# Altium PCB TAFLab Sensors.PcbDoc
Units mm, origin at the board's own origin, x right, y up, seen from the top; angles counter-clockwise.
Board outline 170.5 x 86 mm, 4 copper layers (F.Cu, In1.Cu, In2.Cu, B.Cu); 32 components, 94 nets, 204 pads, 0 vias.
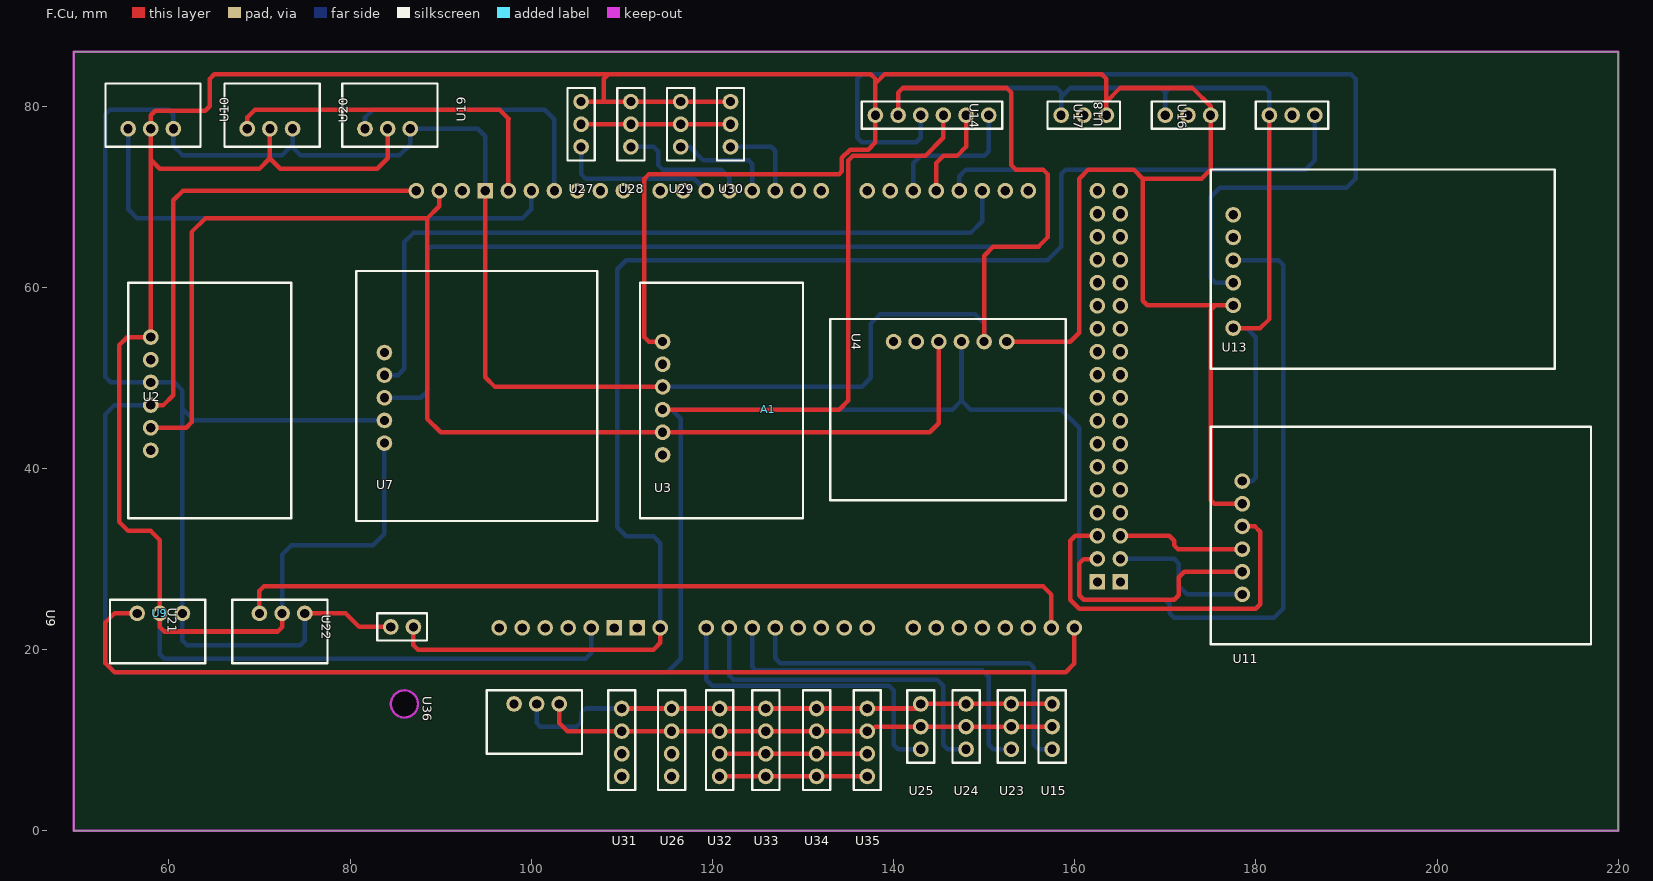
[diagram p0: F.Cu view]
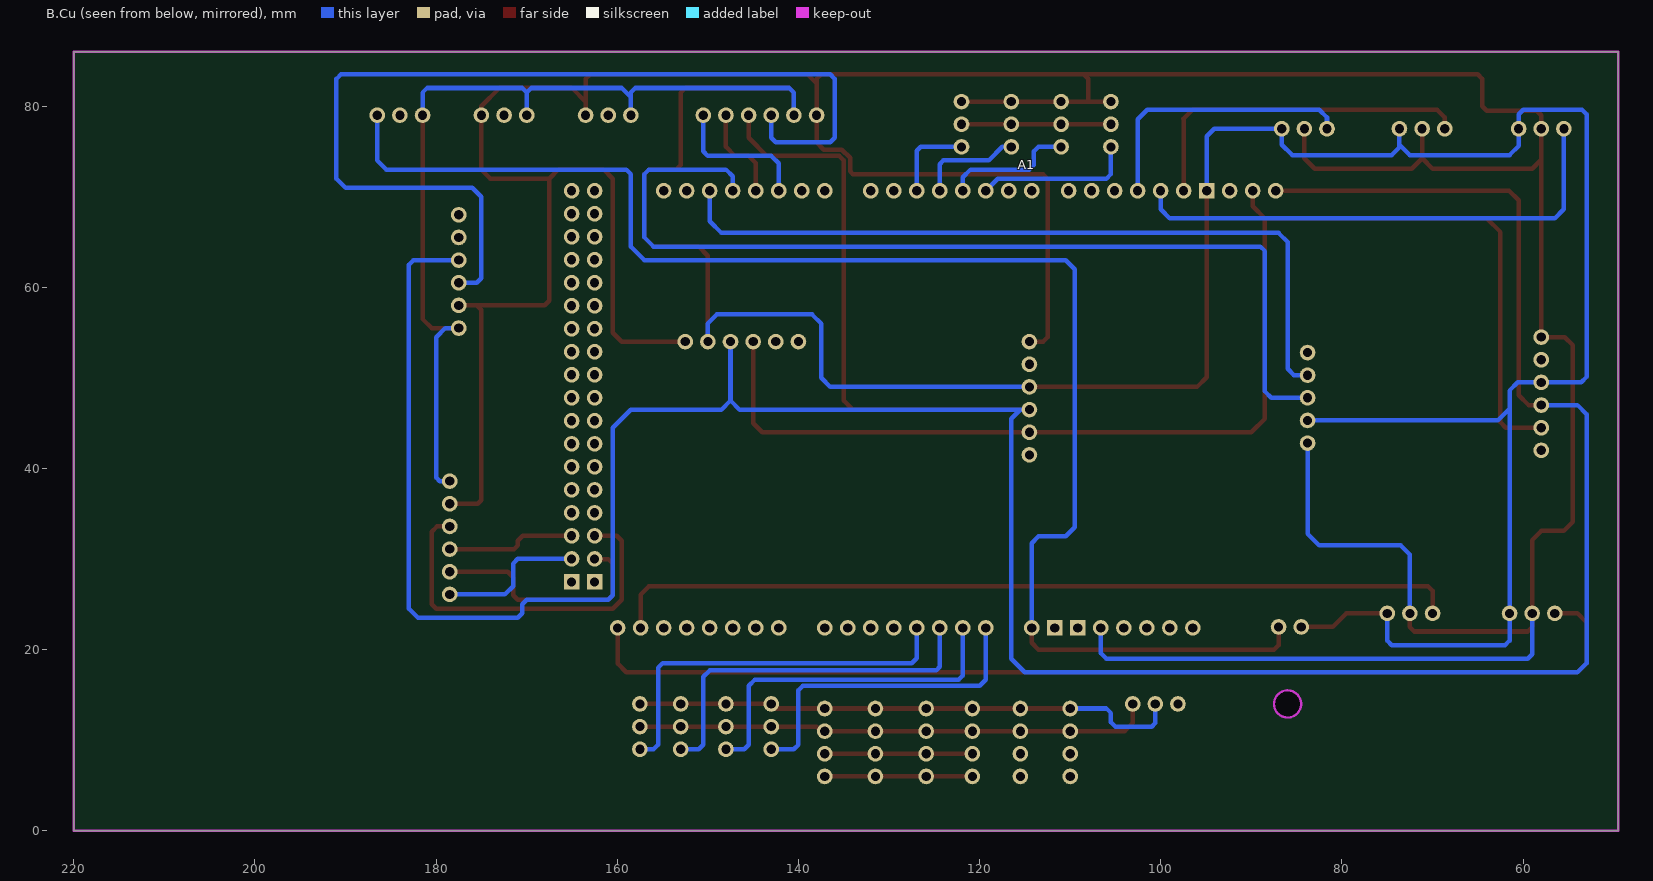
[diagram p1: B.Cu view, seen from below]
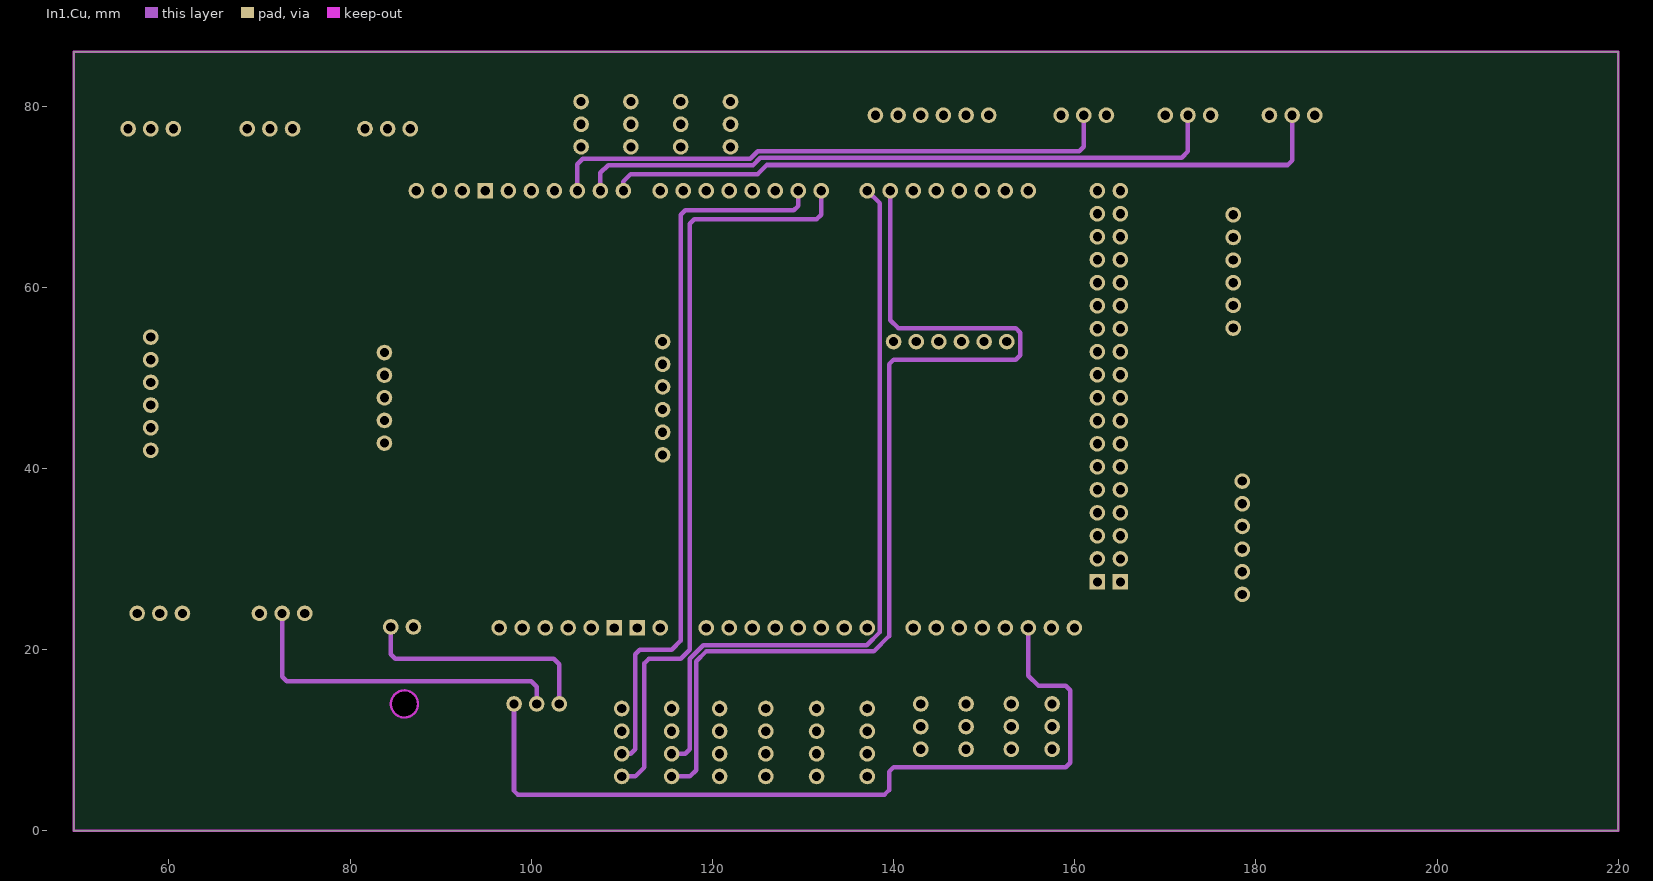
[diagram p2: In1.Cu]
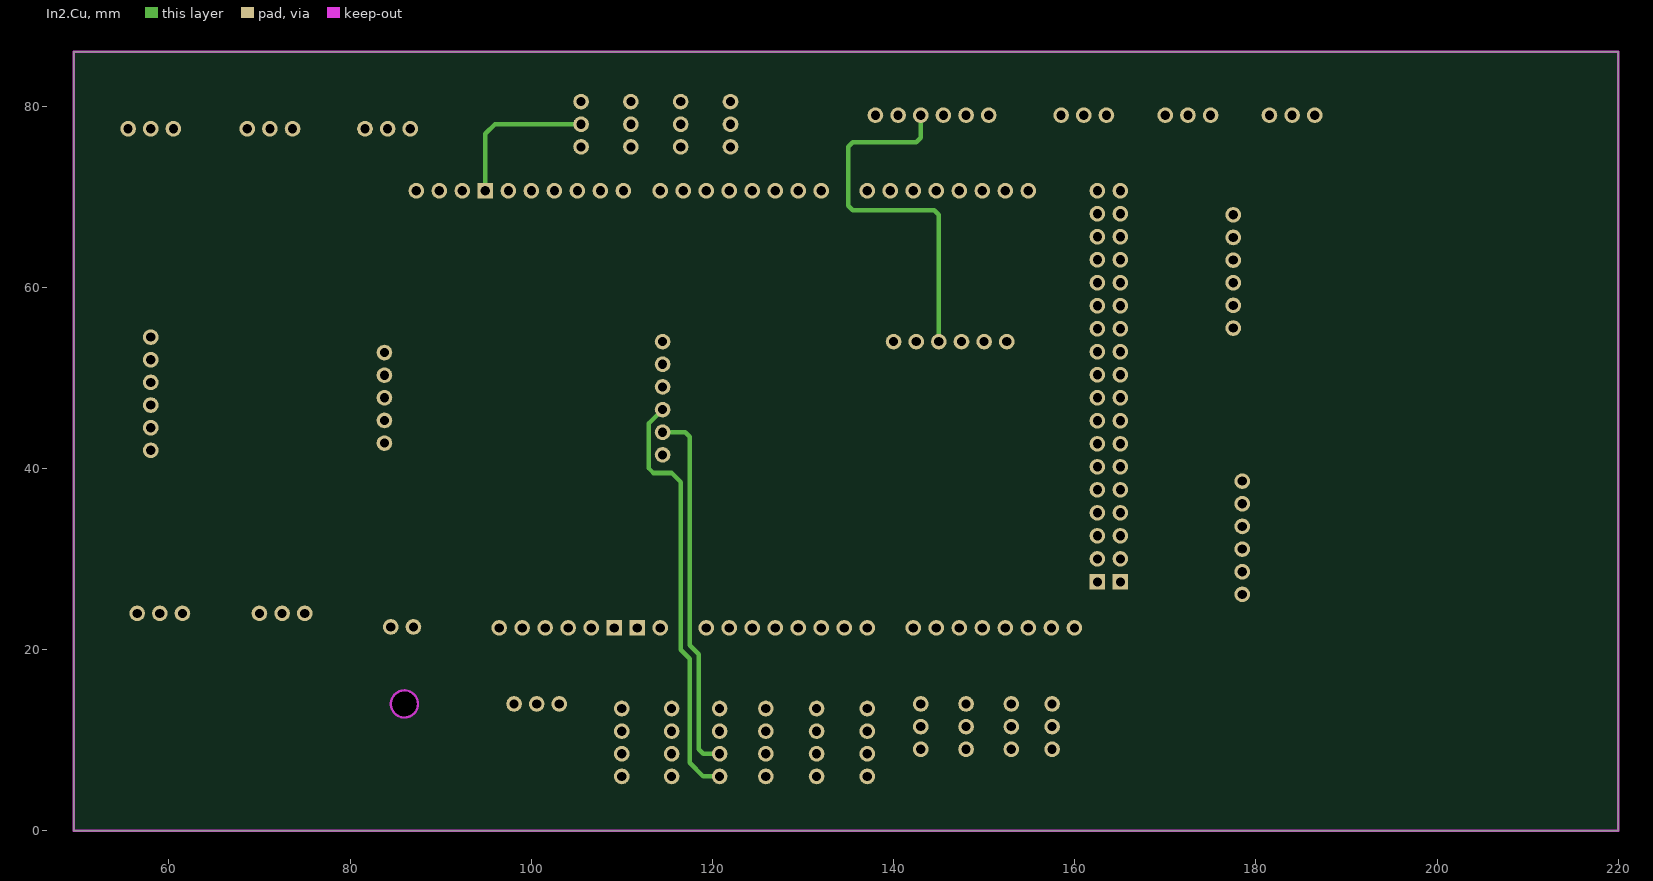
[diagram p3: In2.Cu]

## Layer stack, top to bottom
F.Mask: solder mask 0.0102, Solder Resist, Dk 3.5
F.Cu: signal copper 0.0356
Dielectric 1: dielectric 0.32, FR-4, Dk 4.8
In1.Cu: signal copper 0.0356
Dielectric2: dielectric 0.32, FR-4, Dk 4.8
In2.Cu: signal copper 0.0356
Dielectric3: dielectric 0.32, FR-4, Dk 4.8
B.Cu: signal copper 0.0356
B.Mask: solder mask 0.0102, Solder Resist, Dk 3.5

## Board outline
49.5,86 49.5,0 220,0 220,86 49.5,86
cut-out: 87.507,14 87.478,14.294 87.393,14.577 87.253,14.837 87.066,15.066 86.837,15.253 86.577,15.393 86.294,15.478 86,15.507 85.706,15.478 85.423,15.393 85.163,15.253 84.934,15.066 84.747,14.837 84.607,14.577 84.522,14.294 84.493,14 84.522,13.706 84.607,13.423 84.747,13.163 84.934,12.934 85.163,12.747 85.423,12.607 85.706,12.522 86,12.493 86.294,12.522 86.577,12.607 86.837,12.747 87.066,12.934 87.253,13.163 87.393,13.423 87.478,13.706 87.507,14

## Design rules (kind name [scope] priority, off if disabled: settings)
Clearance [All] p1: gap=0.254 ignorepadtopadclearanceinfootprint=FALSE
MinimumSolderMaskSliver [All] p1: minsoldermaskwidth=0
PolygonConnect [All] p1: connectstyle=Direct reliefconductorwidth=0.254 reliefentries=4 polygonreliefangle="90 Angle" airgapwidth=0.254
RoutingVias [All] p1: holewidth=0.711 width=1.27 viastyle="Through Hole" minholewidth=0.711 minwidth=1.27 maxholewidth=0.711 maxwidth=1.27
SilkToSilkClearance [All] p1: silktosilkclearance=0
SilkToSolderMaskClearance [IsPad] p1: minsilkscreentomaskgap=0 clearancetoexposedcopper=TRUE
SolderMaskExpansion [All] p1: expansion=0.102 istentingtop=FALSE
Width [All] p1: maxlimit=10 minlimit=0.254 preferedwidth=0.254 minimp=50.000000 maximp=50.000000 favimp=50.000000
27 further rules are at their usual default settings.

## Components (designator, comment, footprint, x,y, rotation, side; value= is the part's Value field where it differs from the comment)
A1 "Comment" Arduino_Mega2560_R3_Shield 112.5,19.3 r0 top value=Arduino_Mega2560_R3_Shield
U2 "Comment" LIS3MDL_Magnetometer 58,47.5 r0 top value=~
U3 "Comment" MPU6050_IMU_Accelerometer 114,38 r0 top value=~
U4 "Comment" INA219_BatteryPowerSensor 135.5,54 r270 top value=~
U7 "Comment" GT-U7_GPS 83.8,37.8 r0 top value=~
U9 "Comment" HW038_WaterLevelSensor 46.5,23.5 r270 top value=~
U10 "Comment" DS18B20_Water_Temp_Sensor 66.5,79.5 r90 top value=~
U11 "Comment" Micro_SD_Module 178.5,18.6 r0 top value=~
U13 "Comment" HW84_DS3231_CLK_Module 177.5,53 r0 top value=~
U14 "Comment" ActuatorConnector 148.5,79 r270 top value=~
U15 "Comment" Default3Pin 157.5,4 r0 top value=~
U16 "Comment" ActuatorConnector 171.5,79 r270 top value=~
U17 "Comment" ActuatorConnector 160,79 r270 top value=~
U18 "Comment" SailWireConnector 163,79 r90 top value=~
U19 "Comment" DS18B20_Water_Temp_Sensor 92.65,79.5 r90 top value=~
U20 "Comment" DS18B20_Water_Temp_Sensor 79.65,79.5 r90 top value=~
U21 "Comment" HW038_WaterLevelSensor 60,23.5 r270 top value=~
U22 "Comment" VinArduinoConnector 77,22.5 r270 top value=~
U23 "Comment" Default3Pin 153,4 r0 top value=~
U24 "Comment" Default3Pin 148,4 r0 top value=~
U25 "Comment" Default3Pin 143,4 r0 top value=~
U26 "Comment" Default4Pin 115.5,-1.5 r0 top value=~
U27 "Comment" Default3Pin 105.5,70.5 r0 top value=~
U28 "Comment" Default3Pin 111,70.5 r0 top value=~
U29 "Comment" Default3Pin 116.5,70.5 r0 top value=~
U30 "Comment" Default3Pin 122,70.5 r0 top value=~
U31 "Comment" Default4Pin 110,-1.5 r0 top value=~
U32 "Comment" Default4Pin 120.8,-1.5 r0 top value=~
U33 "Comment" Default4Pin 125.9,-1.5 r0 top value=~
U34 "Comment" Default4Pin 131.5,-1.5 r0 top value=~
U35 "Comment" Default4Pin 137.1,-1.5 r0 top value=~
U36 "Comment" HW038_WaterLevelSensor 88.1,13.5 r270 top value=~

## Footprints (in the part's own frame and the unit in brackets; to place one, negate y for a bottom-side part, rotate by r counter-clockwise, add the part's x,y. Pads: shape width x height; smd on the part's side, far side on the other; paste and mask are expansions set on the pad)
ActuatorConnector [mil]
  rrect100% 68x68 hole 40 paste-99999 mask+0: 1(0,590.55) 2(0,492.13) 3(0,393.7)
  silkscreen extent -59,335 59,650
Arduino_Mega2560_R3_Shield [mil]
  rrect100% 68x68 hole 40 paste-99999 mask+0: 3V3(-331.5,122.05) 5V1(-231.5,122.05) 5V3(1968.5,2022.05) 5V4(2068.5,2022.05) A0(268.5,122.05) A1(368.5,122.05) A2(468.5,122.05) A3(568.5,122.05) A4(668.5,122.05) A5(768.5,122.05) A6(868.5,122.05) A7(968.5,122.05) A8(1168.5,122.05) A9(1268.5,122.05) A10(1368.5,122.05) A11(1468.5,122.05) A12(1568.5,122.05) A13(1668.5,122.05) A14(1768.5,122.05) A15(1868.5,122.05) AREF(-791.5,2022.05) D0(768.5,2022.05) D1(668.5,2022.05) D2(568.5,2022.05) D3(468.5,2022.05) D4(368.5,2022.05) D5(268.5,2022.05) D6(168.5,2022.05) D7(68.5,2022.05) D8(-91.5,2022.05) D9(-191.5,2022.05) D10(-291.5,2022.05) D11(-391.5,2022.05) D12(-491.5,2022.05) D13(-591.5,2022.05) D14(968.5,2022.05) D15(1068.5,2022.05) D16(1168.5,2022.05) D17(1268.5,2022.05) D18(1368.5,2022.05) D19(1468.5,2022.05) D20(1568.5,2022.05) D21(1668.5,2022.05) D22(1968.5,1922.05) D23(2068.5,1922.05) D24(1968.5,1822.05) D25(2068.5,1822.05) D26(1968.5,1722.05) D27(2068.5,1722.05) D28(1968.5,1622.05) D29(2068.5,1622.05) D30(1968.5,1522.05) D31(2068.5,1522.05) D32(1968.5,1422.05) D33(2068.5,1422.05) D34(1968.5,1322.05) D35(2068.5,1322.05) D36(1968.5,1222.05) D37(2068.5,1222.05) D38(1968.5,1122.05) D39(2068.5,1122.05) D40(1968.5,1022.05) D41(2068.5,1022.05) D42(1968.5,922.05) D43(2068.5,922.05) D44(1968.5,822.05) D45(2068.5,822.05) D46(1968.5,722.05) D47(2068.5,722.05) D48(1968.5,622.05) D49(2068.5,622.05) D50(1968.5,522.05) D51(2068.5,522.05) D52(1968.5,422.05) D53(2068.5,422.05) IORF(-531.5,122.05) RST1(-431.5,122.05) SCL(-991.5,2022.05) SDA(-891.5,2022.05) Un1(-631.5,122.05) VIN(68.5,122.05)
  rect 68x68 hole 40 paste-99999 mask+0: GND1(-691.5,2022.05) GND2(-131.5,122.05) GND3(-31.5,122.05) GND5(1968.5,322.05) GND6(2068.5,322.05)
Default3Pin [mil]
  rrect100% 68x68 hole 40 paste-99999 mask+0: 1(0,393.7) 2(0,295.28) 3(0,196.85)
  silkscreen extent -59,138 59,453
Default4Pin [mil]
  rrect100% 68x68 hole 40 paste-99999 mask+0: 1(0,590.55) 2(0,492.13) 3(0,393.7) 4(0,295.28)
  silkscreen extent -59,236 59,669
DS18B20_Water_Temp_Sensor [mil]
  rrect100% 68x68 hole 40 paste-99999 mask+0: 1(-78.74,433.07) 2(-78.74,334.65) 3(-78.74,236.22)
  silkscreen extent -157,118 118,531
GT-U7_GPS [mil]
  rrect100% 68x68 hole 40 paste-99999 mask+0: 1(0,590.55) 2(0,492.13) 3(0,393.7) 4(0,295.28) 5(0,196.85)
  silkscreen extent -122,-142 925,945
HW038_WaterLevelSensor [mil]
  rrect100% 68x68 hole 40 paste-99999 mask+0: 1(-19.69,393.7) 2(-19.69,492.13) 3(-19.69,590.55)
  silkscreen extent -79,276 197,689
HW84_DS3231_CLK_Module [mil]
  rrect100% 68x68 hole 40 paste-99999 mask+0: 1(0,590.55) 2(0,492.13) 3(0,393.7) 4(0,295.28) 5(0,196.85) 6(0,98.43)
  silkscreen extent -98,-79 1398,787
INA219_BatteryPowerSensor [mil]
  rrect100% 68x68 hole 40 paste-99999 mask+0: 1(0,669.29) 2(0,570.87) 3(0,472.44) 4(0,374.02) 5(0,275.59) 6(0,177.17)
  silkscreen extent -98,-98 689,925
LIS3MDL_Magnetometer [mil]
  rrect100% 68x68 hole 40 paste-99999 mask+0: 1(0,275.59) 2(0,177.17) 3(0,78.74) 4(0,-19.68) 5(0,-118.11) 6(0,-216.54)
  silkscreen extent -98,-512 610,512
Micro_SD_Module [mil]
  rrect100% 68x68 hole 40 paste-99999 mask+0: 1(0,787.4) 2(0,688.98) 3(0,590.55) 4(0,492.13) 5(0,393.7) 6(0,295.28)
  silkscreen extent -138,79 1516,1024
MPU6050_IMU_Accelerometer [mil]
  rrect100% 68x68 hole 40 paste-99999 mask+0: 1(19.68,629.92) 2(19.68,531.5) 3(19.68,433.07) 4(19.68,334.65) 5(19.68,236.22) 6(19.68,137.8)
  silkscreen extent -79,-138 630,886
SailWireConnector [mil]
  rrect100% 68x68 hole 40 paste-99999 mask+0: 1(0,984.25) 2(0,885.83) 3(0,787.4) 4(0,688.98) 5(0,590.55) 6(0,492.13)
  silkscreen extent -59,433 59,1043
VinArduinoConnector [mil]
  rrect100% 68x68 hole 40 paste-99999 mask+0: 1(0,393.7) 2(0,295.28)
  silkscreen extent -59,236 59,453

## Part data
A1: library part Arduino_Mega2560_R3_Shield, "https://docs.arduino.cc/hardware/mega-2560", Footprint=PCM_arduino-library:Arduino_Mega2560_R3_Shield, Datasheet=https://docs.arduino.cc/hardware/mega-2560, Description="Shield for Arduino Mega 2560 R3", ki_fp_filters=Arduino_Mega2560_R3_Shield
U2: library part LIS3MDL_Magnetometer, Footprint=TAFLab-Footprint-Library:LIS3MDL_Magnetometer
U3: library part MPU6050_IMU_Accelerometer, Footprint=TAFLab-Footprint-Library:MPU6050_IMU_Accelerometer
U4: library part INA219_BatteryPowerSensor, Footprint=TAFLab-Footprint-Library:INA219_BatteryPowerSensor
U7: library part GT-U7_GPS, Footprint=TAFLab-Footprint-Library:GT-U7_GPS
U9 U21 U36: library part HW038_WaterLevelSensor, Footprint=TAFLab-Footprint-Library:HW038_WaterLevelSensor
U10 U19 U20: library part DS18B20_Water_Temp_Sensor, Footprint=TAFLab-Footprint-Library:DS18B20_Water_Temp_Sensor
U11: library part Micro_SD_Module, Footprint=TAFLab-Footprint-Library:Micro_SD_Module
U13: library part HW84_DS3231_CLK_Module, Footprint=TAFLab-Footprint-Library:HW84_DS3231_CLK_Module
U14 U16 U17: library part ActuatorConnector, Footprint=TAFLab-Footprint-Library:ActuatorConnector
U15 U23 U24 U25 U27 U28 U29 U30: library part Default3Pin, Footprint=TAFLab-Footprint-Library:Default3Pin
U18: library part SailWireConnector, Footprint=TAFLab-Footprint-Library:SailWireConnector
U22: library part VinArduinoConnector, Footprint=TAFLab-Footprint-Library:VinArduinoConnector
U26 U31 U32 U33 U34 U35: library part Default4Pin, Footprint=TAFLab-Footprint-Library:Default4Pin

## Nets (pads, with @x,y where several pads share a name; then routed paths per layer and width w, separated by ;. In a path a pad name is that pad's centre, name@x,y a point inside that pad or via, vN(x,y) a via of type N, cw(c..) or ccw(c..) an arc to the next point about the centre after c; other vN are vias at no path point)
5V: A1.5V1 U2.1 U3.1 U4.1 U7.5 U9.2 U10.2 U11.2 U13.5 U14.1 U15.1 U17.1 U18.1 U19.2 U20.2 U21.2 U23.1 U24.1 U25.1 U26.1 U27.1 U28.1 U29.1 U30.1 U31.1 U32.1 U33.1 U34.1 U35.1 U36.2 | length 600.5
  F.Cu w0.5: U20.2 71.15,74.25 ; U21.2 72.5,22.5 72,22 59.5,22 59,22.5 U9.2 59,32.1 58,33.1 55.5,33.1 54.5,34.1 54.5,53.6 55.4,54.5 U2.1 U10.2 ; U19.2 84.15,74.25 83,73.1 72.3,73.1 71.15,74.25 ; U27.1 108,80.5 ; U31.1 U32.1 U35.1 142.5,13.5 U25.1 U24.1 U15.1 ; U3.1 113,54 112.5,54.5 112.5,72 113,72.5 134,72.5 134.3,72.8 134.3,74.29 135.21,75.2 137.2,75.2 138,76 U18.1 ; U30.1 U29.1 108,80.5 ; U4.1 159.5,54 160.5,55 160.5,72 161.5,73 166.5,73 167.5,72 ; U14.1 163.5,83 163,83.5 139,83.5 138,82.5 U18.1 ; 163.5,80.5 165,82 173,82 175,80 U17.1 175,73 174,72 167.5,72 ; U13.5 175.5,58 ; U11.2 175.4,36.1 175,36.5 175,57.5 175.5,58 ; U10.2 58,74.1 59,73.1 70,73.1 71.15,74.25 ; U10.2 58,79 58.5,79.5 64,79.5 64.5,80 64.5,83 65,83.5 108.5,83.5 ; 108,80.5 108,83 108.5,83.5 ; 108.5,83.5 137.5,83.5 138,83 U18.1 ; 167.5,72 167.5,58.5 168,58 175.5,58
  In1.Cu w0.5: U21.2 72.5,17 73,16.5 100,16.5 100.6,15.9 U36.2
  B.Cu w0.5: U9.2 59,19.5 59.5,19 106,19 106.62,19.62 A1.5V1 ; U21.2 72.5,30.5 73.5,31.5 82.5,31.5 83.8,32.8 U7.5 ; U36.2 100.6,11.9 101,11.5 105,11.5 105.5,12 105.5,13 106,13.5 U31.1
8V: A1.VIN U16.1 U22.1 | length 166.4
  F.Cu w0.5: U22.1 87,20.5 87.5,20 113.5,20 114.24,20.74 A1.VIN
  B.Cu w0.5: A1.VIN 114.24,31.76 113.5,32.5 110.5,32.5 109.5,33.5 109.5,62 110.5,63 157,63 158.5,64.5 158.5,72.5 159,73 185.5,73 186.5,74 U16.1
A0: A1.A0 U25.3 | length 36.1
  B.Cu w0.5: A1.A0 119.32,16.68 120,16 139.5,16 140,15.5 140,9.5 140.5,9 U25.3
A1: A1.A1 U24.3 | length 38.6
  B.Cu w0.5: A1.A1 121.86,17.14 122.3,16.7 144.8,16.7 145.5,16 145.5,9.5 146,9 U24.3
A2: A1.A2 U23.3 | length 41.1
  B.Cu w0.5: A1.A2 124.4,18.1 124.8,17.7 149.8,17.7 150.5,17 150.5,9.5 151,9 U23.3
A3: A1.A3 U15.3 | length 43
  B.Cu w0.5: A1.A3 126.94,19.06 127.5,18.5 155,18.5 155.5,18 155.5,9.5 156,9 U15.3
A13: A1.A13 U36.1 | length 92.4
  In1.Cu w0.5: U36.1 98.1,4.4 98.5,4 139,4 139.5,4.5 139.5,6.5 140,7 159,7 159.5,7.5 159.5,15.5 159,16 156,16 154.88,17.12 A1.A13
A14: A1.A14 U21.1 | length 94.2
  F.Cu w0.5: U21.1 70,26.5 70.5,27 156.5,27 157.42,26.08 A1.A14
A15: A1.A15 U9.1 | length 120.1
  F.Cu w0.5: U9.1 54,24 53,23 53,18.5 54,17.5 159,17.5 159.96,18.46 A1.A15
CS: A1.D53 U11.6 | length 16.5
  B.Cu w0.5: A1.D53 170.98,30.02 171.5,29.5 171.5,27 172.4,26.1 U11.6
D2: A1.D2 U30.3 | length 9.5
  B.Cu w0.5: U30.3 126.5,75.5 126.94,75.06 A1.D2
D3: A1.D3 U29.3 | length 11.6
  B.Cu w0.5: U29.3 117.5,75.5 119,74 124,74 124.4,73.6 A1.D3
D4: A1.D4 U28.3 | length 14.6
  B.Cu w0.5: U28.3 113.5,75.5 114,75 114,73.5 114.5,73 121,73 121.86,72.14 A1.D4
D5: A1.D5 U27.3 | length 17.6
  B.Cu w0.5: U27.3 105.5,72.5 106,72 117.98,72 A1.D5
D8: A1.D8 U16.2 | length 80.8
  In1.Cu w0.5: A1.D8 110.176,71.676 111,72.5 125,72.5 126,73.5 183.5,73.5 184,74 U16.2
D9: A1.D9 U17.2 | length 71.8
  In1.Cu w0.5: A1.D9 107.636,72.636 108.486,73.486 124.476,73.486 124.49,73.5 124.5,73.5 125.3,74.3 171.8,74.3 172.5,75 U17.2
D10: A1.D10 U14.2 | length 63.1
  In1.Cu w0.5: A1.D10 105.096,73.596 105.686,74.186 124.186,74.186 125,75 160.5,75 161,75.5 U14.2
D11: A1.D11 U19.1 | length 30.8
  B.Cu w0.5: U19.1 81.65,78.75 82.5,79.6 101.5,79.6 102.556,78.544 A1.D11
D12: A1.D12 U10.1 | length 56.3
  B.Cu w0.5: U10.1 55.5,68.6 56.5,67.6 99,67.6 100.016,68.616 A1.D12
D13: A1.D13 U20.1 | length 38.8
  F.Cu w0.5: U20.1 68.65,78.75 69.5,79.6 96.5,79.6 97.5,78.6 97.476,78.576 A1.D13
GND: A1.GND1 U2.3 U3.3 U4.2 U7.4 U9.3 U10.3 U11.1 U13.6 U14.3 U15.2 U16.3 U17.3 U18.2 U19.3 U20.3 U21.3 U22.2 U23.2 U24.2 U25.2 U26.2 U27.2 U28.2 U29.2 U30.2 U31.2 U32.2 U33.2 U34.2 U35.2 U36.3 | length 531.3
  F.Cu w0.5: U21.3 79.5,24 81,22.5 U22.2 ; A1.GND1 94.936,50.064 96,49 U3.3 ; U36.3 103.1,11.9 104,11 U31.2 U35.2 137.5,11 138,11.5 U25.2 U24.2 U15.2 ; U27.2 U29.2 U30.2 ; U18.2 140.5,81.5 141,82 152.5,82 153,81.5 153,73.5 153.5,73 156.5,73 157,72.5 157,65.5 156,64.5 151,64.5 150,63.5 U4.2 ; U13.6 180.5,55.5 181.5,56.5 U16.3
  In1.Cu w0.5: U22.2 84.5,19.5 85,19 102.5,19 103.1,18.4 U36.3
  In2.Cu w0.5: A1.GND1 94.936,76.936 96,78 U27.2
  B.Cu w0.5: U21.3 75,21 74.5,20.5 62,20.5 61.5,21 U9.3 61.5,46.6 ; U7.4 62.8,45.3 61.5,46.6 ; A1.GND1 94.936,76.664 94.1,77.5 U19.3 86.65,75.75 85.5,74.6 74.5,74.6 73.65,75.45 U20.3 73.65,75.75 72.5,74.6 61.5,74.6 60.5,75.6 U10.3 60.5,79.1 60,79.6 53.5,79.6 53,79.1 53,50.1 53.6,49.5 U2.3 60.6,49.5 61.5,48.6 61.5,46.6 ; U3.3 136.5,49 137.5,50 137.5,56 138.5,57 149,57 150,56 U4.2 ; U18.2 140.5,81.5 141,82 158,82 158.5,81.5 U14.3 158.5,81 159.5,82 169.5,82 170,81.5 ; U17.3 170,81.5 ; U13.6 179,55.5 180,54.5 180,39 179.6,38.6 U11.1 ; U16.3 181.5,81.5 181,82 170.5,82 170,81.5
MISO: A1.D50 U11.3 | length 41.6
  F.Cu w0.5: A1.D50 160.06,32.56 159.5,32 159.5,25.5 160.5,24.5 180,24.5 180.5,25 180.5,33 179.9,33.6 U11.3
MOSI: A1.D51 U11.4 | length 14.4
  F.Cu w0.5: A1.D51 170.44,32.56 171,32 171,31.5 171.4,31.1 U11.4
RX0: A1.D1 U31.3 | length 79.9
  In1.Cu w0.5: U31.3 111,8.5 111.5,9 111.5,19.5 112,20 115.5,20 116.5,21 116.5,68 117,68.5 129,68.5 129.48,68.98 A1.D1
RX1: A1.D18 U7.3 | length 108.5
  B.Cu w0.5: U7.3 87.8,47.8 88.5,48.5 88.5,64 89,64.5 156,64.5 157,65.5 157,72.5 156.5,73 148,73 147.26,72.26 A1.D18
RX2: A1.D16 U18.6 | length 15.9
  B.Cu w0.5: A1.D16 142.18,73.68 143,74.5 150,74.5 150.5,75 U18.6
RX3: A1.D14 U26.3 | length 83.7
  In1.Cu w0.5: U26.3 117,8.5 117.5,9 117.5,19 119,20.5 137.058,20.5 138.5,21.942 138.5,69.26 A1.D14
SCK: A1.D52 U11.5 | length 26.4
  F.Cu w0.5: A1.D52 162.413,30.02 162.393,30 161,30 160.5,29.5 160.5,26 161,25.5 171,25.5 171.5,26 171.5,28 172.1,28.6 U11.5
SCL: A1.SCL U2.4 U3.4 U4.3 U13.3 U18.4 U32.4 U33.4 U34.4 U35.4 | length 443.3
  F.Cu w0.5: U2.4 59.4,47 60.5,48.1 60.5,69.6 61.56,70.66 A1.SCL ; U3.4 134,46.5 135,47.5 135,74 135.5,74.5 143.5,74.5 145.5,76.5 U18.4 ; U32.4 U35.4
  In2.Cu w0.5: U3.4 113,45 113,40 113.5,39.5 115.5,39.5 116.5,38.5 116.5,20 117.5,19 117.5,7.5 119,6 U32.4
  B.Cu w0.5: U2.4 54,47 53,46 53,18.5 54,17.5 115,17.5 116.5,19 116.5,45.5 115.5,46.5 U3.4 146.5,46.5 147.5,47.5 ; U4.3 147.5,47.5 ; U13.3 182.5,63 183,62.5 183,24.5 182,23.5 171,23.5 170.5,24 170.5,25 170,25.5 161,25.5 160.5,26 160.5,44.5 158.5,46.5 148.5,46.5 147.5,47.5
SDA: A1.SDA U2.5 U3.5 U4.4 U13.4 U18.3 U32.3 U33.3 U34.3 U35.3 | length 354.8
  F.Cu w0.5: U2.5 61.9,44.5 62.5,45.1 62.5,66.1 64,67.6 88.5,67.6 ; A1.SDA 89.856,68.956 88.5,67.6 ; U32.3 U35.3 ; U4.4 145,45 144,44 U3.5 90,44 88.5,45.5 88.5,67.6
  In2.Cu w0.5: U3.5 117,44 117.5,43.5 117.5,20.5 118.5,19.5 118.5,9 119,8.5 U32.3 ; U18.3 143,76.5 142.5,76 135.5,76 135,75.5 135,69 135.5,68.5 144.5,68.5 145,68 U4.4
  B.Cu w0.5: U18.3 143,76.5 142.5,76 136.5,76 136,76.5 136,83 136.5,83.5 171.936,83.5 171.963,83.527 171.991,83.5 190.5,83.5 191,83 191,72 190,71 176,71 175,70 175,61 175.5,60.5 U13.4
TX0: A1.D0 U31.4 | length 84.6
  In1.Cu w0.5: U31.4 111.5,6 112.5,7 112.5,18.5 113,19 116.5,19 117.5,20 117.5,67 118,67.5 131.5,67.5 132.02,68.02 A1.D0
TX1: A1.D19 U7.2 | length 84.6
  B.Cu w0.5: U7.2 85.3,50.3 86,51 86,65 87,66 148.5,66 149.8,67.3 A1.D19
TX2: A1.D17 U18.5 | length 10.6
  F.Cu w0.5: A1.D17 144.72,73.72 145.5,74.5 147,74.5 148,75.5 U18.5
TX3: A1.D15 U26.4 | length 114.1
  In1.Cu w0.5: U26.4 117.5,6 118.2,6.7 118.2,18.7 119.3,19.8 137.8,19.8 139.5,21.5 139.5,51.5 140,52 153.5,52 154,52.5 154,55 153.5,55.5 140.5,55.5 139.64,56.36 A1.D15
unconnected-(A1-3.3V-Pad3V3): A1.3V3
unconnected-(A1-5V-Pad5V3): A1.5V3
unconnected-(A1-5V-Pad5V4): A1.5V4
unconnected-(A1-D20{slash}SDA-PadD20): A1.D20
unconnected-(A1-D21{slash}SCL-PadD21): A1.D21
unconnected-(A1-GND-PadGND2): A1.GND2
unconnected-(A1-GND-PadGND3): A1.GND3
unconnected-(A1-GND-PadGND5): A1.GND5
unconnected-(A1-GND-PadGND6): A1.GND6
unconnected-(A1-IOREF-PadIORF): A1.IORF
unconnected-(A1-PadA4): A1.A4
unconnected-(A1-PadA5): A1.A5
unconnected-(A1-PadA6): A1.A6
unconnected-(A1-PadA7): A1.A7
unconnected-(A1-PadA8): A1.A8
unconnected-(A1-PadA9): A1.A9
unconnected-(A1-PadA10): A1.A10
unconnected-(A1-PadA11): A1.A11
unconnected-(A1-PadA12): A1.A12
unconnected-(A1-PadAREF): A1.AREF
unconnected-(A1-PadD6): A1.D6
unconnected-(A1-PadD7): A1.D7
unconnected-(A1-PadD22): A1.D22
unconnected-(A1-PadD23): A1.D23
unconnected-(A1-PadD24): A1.D24
unconnected-(A1-PadD25): A1.D25
unconnected-(A1-PadD26): A1.D26
unconnected-(A1-PadD27): A1.D27
unconnected-(A1-PadD28): A1.D28
unconnected-(A1-PadD29): A1.D29
unconnected-(A1-PadD30): A1.D30
unconnected-(A1-PadD31): A1.D31
unconnected-(A1-PadD32): A1.D32
unconnected-(A1-PadD33): A1.D33
unconnected-(A1-PadD34): A1.D34
unconnected-(A1-PadD35): A1.D35
unconnected-(A1-PadD36): A1.D36
unconnected-(A1-PadD37): A1.D37
unconnected-(A1-PadD38): A1.D38
unconnected-(A1-PadD39): A1.D39
unconnected-(A1-PadD40): A1.D40
unconnected-(A1-PadD41): A1.D41
unconnected-(A1-PadD42): A1.D42
unconnected-(A1-PadD43): A1.D43
unconnected-(A1-PadD44): A1.D44
unconnected-(A1-PadD45): A1.D45
unconnected-(A1-PadD46): A1.D46
unconnected-(A1-PadD47): A1.D47
unconnected-(A1-PadD48): A1.D48
unconnected-(A1-PadD49): A1.D49
unconnected-(A1-RESET-PadRST1): A1.RST1
unconnected-(U2-3Vo-Pad2): U2.2
unconnected-(U2-INT-Pad6): U2.6
unconnected-(U3-3Vo-Pad2): U3.2
unconnected-(U3-INT-Pad6): U3.6
unconnected-(U4-VIN+-Pad6): U4.6
unconnected-(U4-VIN--Pad5): U4.5
unconnected-(U7-PPS-Pad1): U7.1
unconnected-(U13-32K-Pad1): U13.1
unconnected-(U13-SQW-Pad2): U13.2
pads on no net: A1.Un1

## Keep-outs
Edge.Cuts:
  circle w0.254: c86,14 r1.5
  lines w0: 49.5,0 220,0 220,86 49.5,86 49.5,0
  lines w0.254: 49.5,0 220,0 220,86 49.5,86 49.5,0

## Silkscreen, mask and mechanical layers (free items; w line width, h text height)
F.Mask:
  text "WATER TEMP" at 53.81,79.8 h1
  text "WATER TEMP" at 66.96,79.8 h1
  text "WATER TEMP" at 80.11,79.8 h1
  text "V" at 123.59,79.513 h0.65
  text "G" at 123.605,77.013 h0.65
  text "S" at 188.133,76.8 h2
  text "SAIL" at 130.241,76.74 h1.8
  text "R" at 164.933,76.6 h2
  text "E" at 176.481,76.6 h2
  text "D" at 56.121,75.513 h0.65
  text "V" at 58.59,75.513 h0.65
  text "G" at 61.105,75.513 h0.65
  text "D" at 123.621,74.513 h0.65
  text "CLK MODULE" at 194.573,67.6 h2
  text "SD CARD" at 203.987,39.6 h2
  text "BATTERY POWER" at 134.151,36.8 h1
  text "MAGNOMETER" at 63.803,34.8 h1
  text "ACCELEROMETER" at 117.704,34.4 h1
  text "GPS" at 101.101,33.6 h2
  text "VOLT REG" at 82.536,24.3 h1
  text "A" at 55.09,22.013 h0.65
  text "V" at 57.59,22.013 h0.65
  text "G" at 60.105,22.013 h0.65
  text "G" at 82.045,20.438 h0.75
  text "V" at 88.527,20.438 h0.75
  text "WATER LEVEL" at 54.306,18.86 h1
  text "WATER LEVEL" at 67.806,18.86 h1
  text "V" at 140.59,14.013 h0.65
  text "V" at 107.59,13.513 h0.65
  text "V" at 118.09,13.513 h0.65
  text "G" at 140.605,11.513 h0.65
  text "G" at 107.605,11.013 h0.65
  text "G" at 118.105,11.013 h0.65
  text "UC BERKELEY TAFLAB / BOAT PCB" at 167.156,9.443 h2.5
  text "A" at 140.59,9.013 h0.65
  text "RX" at 106.832,8.513 h0.65
  text "WATER TEMP" at 95.52,8.36 h1
  text "SDA" at 119.487,8.011 h0.65 r90
  text "TX" at 106.866,5.513 h0.65
  text "BY: NICK BUI" at 178.86,5.11 h1.5
  text "SCL" at 119.487,5.039 h0.65 r90

## Dimensions
49.5,86 to 220,86 on Edge.Cuts
220,86 to 220,0 on Edge.Cuts